# Altium PCB LM-008.PcbDoc (part 2 of 3)
Units mil, origin at the board's own origin, x right, y up, seen from the top; angles counter-clockwise.
Board outline 2639.74 x 2756.53 mil, 2 copper layers (Top Layer, Bottom Layer); 59 components, 36 nets, 707 pads, 397 vias.
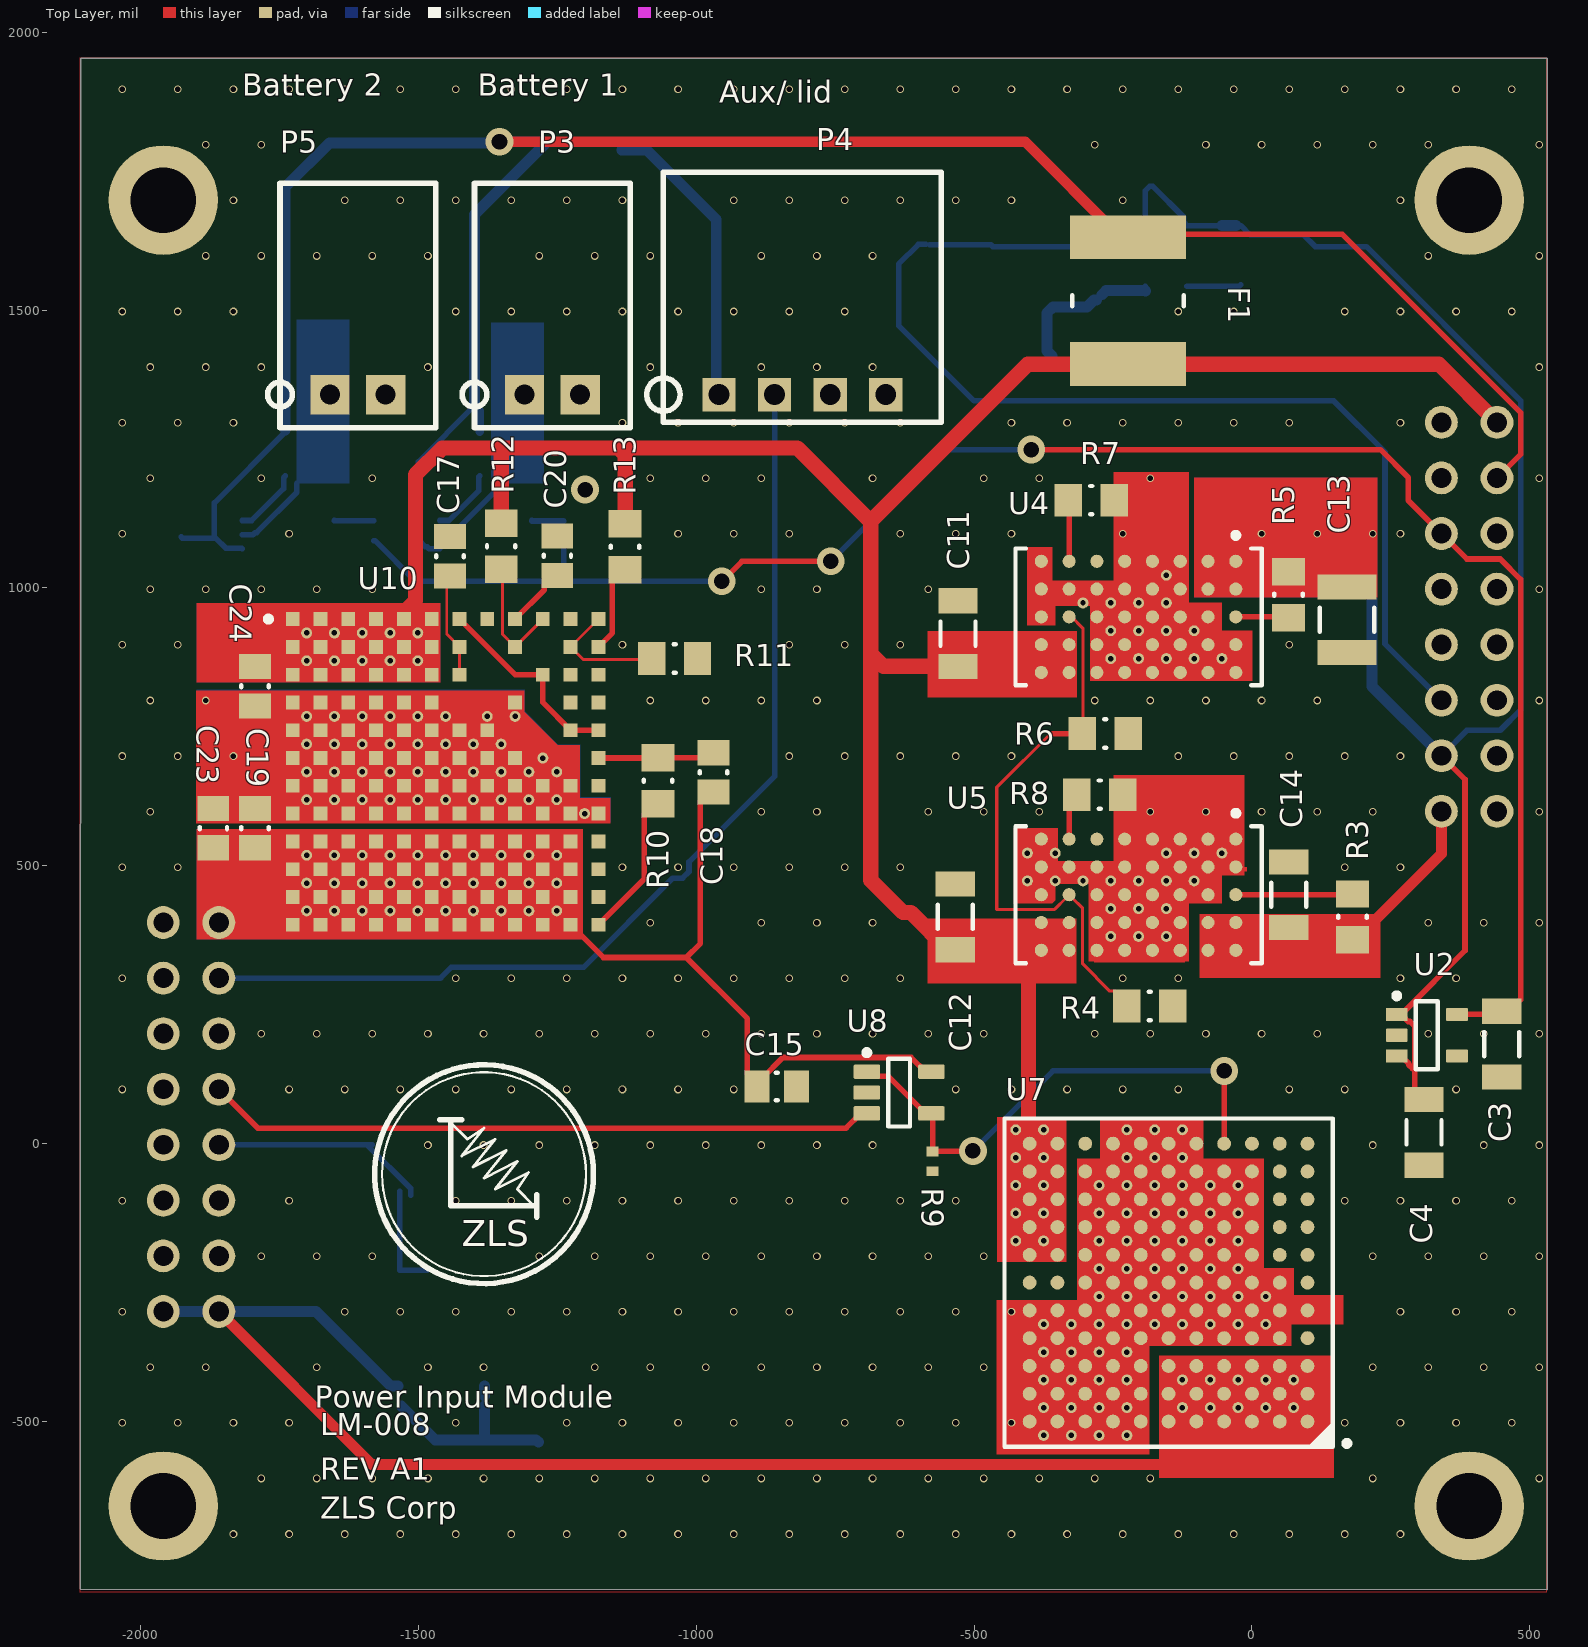
[diagram p0: Top Layer view]

## Free pads (board coordinates) (continued)
  round 19.68 hole 9.84: 4(-1701,419) 4(-1701,469) 4(-1701,519) 4(-1701,619) 4(-1701,669) 4(-1701,719) 4(-1701,769) 4(-1701,869) 4(-1701,919) 4(-1651,419) 4(-1651,469) 4(-1651,519) 4(-1651,619) 4(-1651,669) 4(-1651,719) 4(-1651,769) 4(-1651,869) 4(-1651,919) 4(-1601,419) 4(-1601,469) 4(-1601,519) 4(-1601,619) 4(-1601,669) 4(-1601,719) 4(-1601,769) 4(-1601,869) 4(-1601,919) 4(-1551,419) 4(-1551,469) 4(-1551,519) 4(-1551,619) 4(-1551,669) 4(-1551,719) 4(-1551,769) 4(-1551,869) 4(-1551,919) 4(-1501,419) 4(-1501,469) 4(-1501,519) 4(-1501,619) 4(-1501,669) 4(-1501,719) 4(-1501,769) 4(-1501,869) 4(-1501,919) 4(-1451,419) 4(-1451,469) 4(-1451,519) 4(-1451,619) 4(-1451,669) 4(-1451,719) 4(-1451,769) 4(-1401,419) 4(-1401,469) 4(-1401,519) 4(-1401,619) 4(-1401,669) 4(-1401,719) 4(-1376,769) 4(-1351,419) 4(-1351,469) 4(-1351,519) 4(-1351,619) 4(-1351,669) 4(-1351,719) 4(-1326,769) 4(-1301,419) 4(-1301,469) 4(-1301,519) 4(-1301,619) 4(-1301,669) 4(-1276,694) 4(-1251,419) 4(-1251,469) 4(-1251,519) 4(-1251,619) 4(-1251,669) 4(-1201,594) 4(-425,-175) 4(-425,-125) 4(-425,-75) 4(-425,-25) 4(-425,25) 4(-404,473) 4(-404,523) 4(-375,-525) 4(-375,-475) 4(-375,-425) 4(-375,-375) 4(-375,-325) 4(-375,-175) 4(-375,-125) 4(-375,-75) 4(-375,-25) 4(-375,25) 4(-354,473) 4(-354,523) 4(-325,-525) 4(-325,-475) 4(-325,-425) 4(-325,-375) 4(-325,-325) 4(-304,473) 4(-304,973) 4(-275,-525) 4(-275,-475) 4(-275,-425) 4(-275,-375) 4(-275,-325) 4(-275,-275) 4(-275,-225) 4(-275,-175) 4(-275,-125) 4(-275,-75) 4(-254,373) 4(-254,423) 4(-254,473) 4(-254,873) 4(-254,923) 4(-254,973) 4(-225,-525) 4(-225,-475) 4(-225,-425) 4(-225,-375) 4(-225,-325) 4(-225,-275) 4(-225,-225) 4(-225,-175) 4(-225,-125) 4(-225,-75) 4(-225,-25) 4(-225,25) 4(-204,373) 4(-204,423) 4(-204,473) 4(-204,873) 4(-204,923) 4(-204,973) 4(-175,-325) 4(-175,-275) 4(-175,-225) 4(-175,-175) 4(-175,-125) 4(-175,-75) 4(-175,-25) 4(-175,25) 4(-154,373) 4(-154,423) 4(-154,473) 4(-154,523) 4(-154,873) 4(-154,923) 4(-154,973) 4(-154,1023) 4(-125,-475) 4(-125,-425) 4(-125,-325) 4(-125,-275) 4(-125,-225) 4(-125,-175) 4(-125,-125) 4(-125,-75) 4(-125,-25) 4(-125,25) 4(-104,473) 4(-104,523) 4(-104,873) 4(-104,923) 4(-75,-475) 4(-75,-425) 4(-75,-325) 4(-75,-275) 4(-75,-225) 4(-75,-175) 4(-75,-125) 4(-75,-75) 4(-54,523) 4(-54,873) 4(-25,-475) 4(-25,-425) 4(-25,-325) 4(-25,-275) 4(-25,-225) 4(-25,-175) 4(-25,-125) 4(-25,-75) 4(25,-475) 4(25,-425) 4(25,-325) 4(25,-275) 4(75,-475) 4(75,-425)

## Via types
v1: diameter 13.78, hole 9.84, Top Layer to Bottom Layer, 390 vias
v2: diameter 50, hole 28, Top Layer to Bottom Layer, 7 vias